# EAGLE board Inductance_meter (EAGLE 6.4)
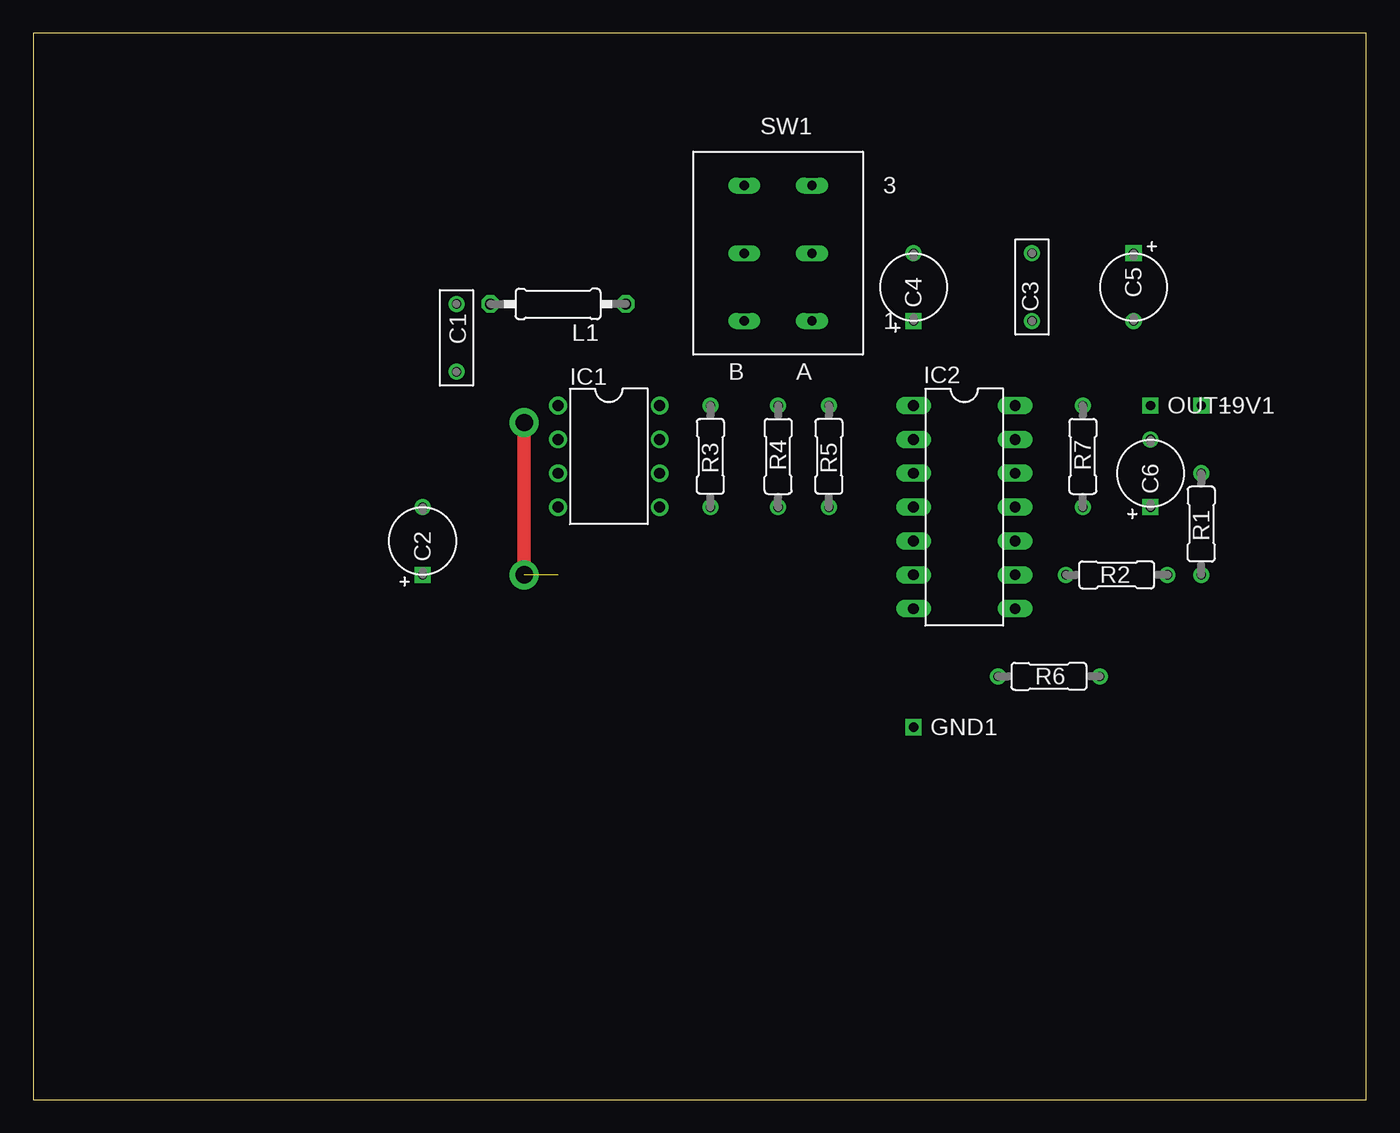
[diagram p0: board, top side]
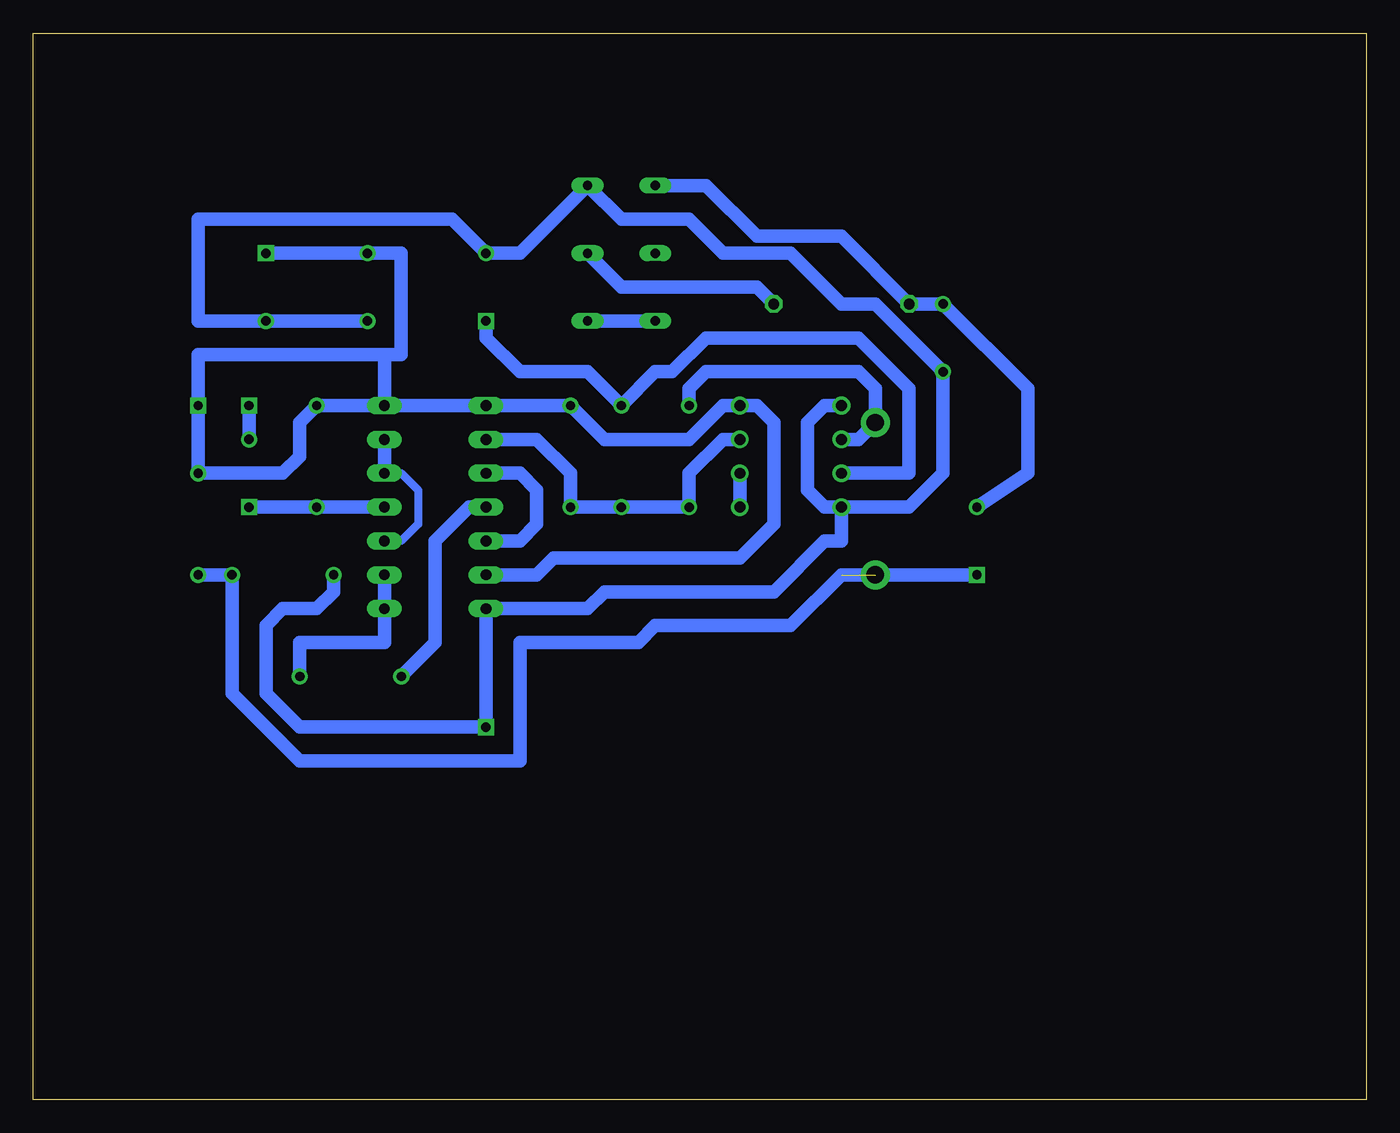
[diagram p1: board, bottom side, seen from below]

Size 100 x 80 mm. Coordinates in mm from the lower left corner, seen from the top.
Outline: 0,0 100,0 100,80 0,80 0,0
Copper layers (1*16): Top 0.035mm / dielectric 1.5mm / Bottom 0.035mm
Design rules "default *": minimum track width 10mil, minimum drill 24mil, track to track 8mil, track to pad 8mil, pad to pad 8mil, via to via 8mil, smd to smd 8mil, copper to edge 40mil, drill to drill 8mil, minimum pad ring 10mil, minimum via ring 8mil, stop-mask expansion 4mil, vias tented up to drill 0mil, thermal gap 10mil

## Footprints (pad centres in the part's own frame; a part is rotated, then mirrored left to right if it is on the bottom)
SQUARE = drill 0.7 square: 1 0,0
072X025 = drill 0.7: 1 -2.54,0; 2 2.54,0
050_020_2 = drill 0.7 square: + -2.54,0 | drill 0.7: - 2.54,0
DIL08 = drill 0.813 pad 1.27: 1 -3.81,-3.81; 2 -1.27,-3.81; 3 1.27,-3.81; 4 3.81,-3.81; 5 3.81,3.81; 6 1.27,3.81; 7 -1.27,3.81; 8 -3.81,3.81
DIL14 = drill 0.813 long: 1 -7.62,-3.81; 2 -5.08,-3.81; 3 -2.54,-3.81; 4 0,-3.81; 5 2.54,-3.81; 6 5.08,-3.81; 7 7.62,-3.81; 8 7.62,3.81; 9 5.08,3.81; 10 2.54,3.81; 11 0,3.81; 12 -2.54,3.81; 13 -5.08,3.81; 14 -7.62,3.81
0207/10 = drill 0.813 octagon: 1 -5.08,0; 2 5.08,0
R0207/3 = drill 0.7: 1 -3.81,0; 2 3.81,0
DPDT = drill 0.7 long: A1 -2.54,5.08; A2 -2.54,0; A3 -2.54,-5.08; B1 2.54,5.08; B2 2.54,0; B3 2.54,-5.08

## Placement (x,y rotation side)
+9V1  +9V(T)  [SQUARE]  87.63,52.07 0 top
C1  970pF  [072X025]  31.75,57.15 270 top
C2  10uF  [050_020_2]  29.21,41.91 90 top
C3  0,1uF  [072X025]  74.93,60.96 90 top
C4  10uF  [050_020_2]  66.04,60.96 90 top
C5  100uF  [050_020_2]  82.55,60.96 270 top
C6  100uF  [050_020_2]  83.82,46.99 90 top
GND1  GND(T)  [SQUARE]  66.04,27.94 0 top
IC1  LM311N  [DIL08]  43.18,48.26 270 top
IC2  4011N  [DIL14]  69.85,44.45 270 top
L1  68uH  [0207/10]  39.37,59.69 180 top
OUT1  OUT(T)  [SQUARE]  83.82,52.07 0 top
R1  100K  [R0207/3]  87.63,43.18 90 top
R2  100K  [R0207/3]  81.28,39.37 0 top
R3  100K  [R0207/3]  50.8,48.26 90 top
R4  47K  [R0207/3]  55.88,48.26 270 top
R5  1K  [R0207/3]  59.69,48.26 90 top
R6  150R  [R0207/3]  76.2,31.75 180 top
R7  1K  [R0207/3]  78.74,48.26 270 top
SW1  DPDT  [DPDT]  55.88,63.5 180 top

## Library data of the parts
+9V1 GND1 OUT1 = gm-supply
C1 C3 = gm-caps-film-box
C2 C4-C6 = gm-caps-electro-pol
IC1 = linear
IC2 = 40xx
L1 = eagle-ltspice; SPICEMODEL: NONE; SPICEPREFIX: L
R1-R7 = gm-resistors
SW1 = gm-switches

## Nets
+9V: +9V1.1 C3.2 C5.+ IC1.8 IC2.1 IC2.6 IC2.14 R1.2 R5.2 R7.1
GND: C1.2 C3.1 C4.- C5.- GND1.1 IC1.1 IC1.4 IC2.7 R2.1 SW1.A3
N$1: L1.1 SW1.A2
N$2: C1.1 C2.- L1.2 SW1.B3
N$3: SW1.A1 SW1.B1
N$5: IC1.7 IC2.2 R3.1 R4.2 R5.1
N$6: C2.+ IC1.2 R1.1 R2.2 R3.2
N$7: IC2.4 R6.2
N$8: IC1.5 IC1.6
N$9: C4.+ IC1.3 R4.1
N$11: IC2.3 IC2.5
N$12: IC2.8 IC2.9 R6.1
N$13: IC2.10 IC2.12 IC2.13
N$14: C6.+ IC2.11 R7.2
OUT: C6.- OUT1.1

## Tracks (layer width: path | path; a pad name or v marks a point on that pad's centre or on a via)
+9V
  Bottom 1.016: IC2.14 R7.1 80.01,50.8 80.01,48.26 81.28,46.99 R1.2 +9V1.1 87.63,55.88 73.66,55.88 | IC2.14 IC2.1 R5.2 57.15,49.53 50.8,49.53 48.26,52.07 IC1.8 45.72,52.07 44.45,50.8 44.45,43.18 46.99,40.64 60.96,40.64 62.23,39.37 IC2.6 | C5.+ C3.2 72.39,63.5 72.39,55.88 73.66,55.88 | IC2.14 73.66,55.88
GND
  Bottom 1.016: IC1.4 40.64,44.45 41.91,45.72 41.91,50.8 40.64,52.07 IC1.1 | IC1.4 39.37,41.91 40.64,41.91 44.45,38.1 57.15,38.1 58.42,36.83 IC2.7 GND1.1 80.01,27.94 82.55,30.48 82.55,35.56 81.28,36.83 78.74,36.83 77.47,38.1 R2.1 | IC1.4 34.29,44.45 31.75,46.99 C1.2 36.83,59.69 39.37,59.69 43.18,63.5 48.26,63.5 50.8,66.04 55.88,66.04 SW1.A3 63.5,63.5 C4.- 68.58,66.04 87.63,66.04 87.63,58.42 C5.- C3.1
N$1
  Bottom 1.016: L1.1 45.72,60.96 55.88,60.96 SW1.A2
N$2
  Bottom 1.016: C2.- 25.4,46.99 25.4,53.34 C1.1 L1.2 39.37,64.77 45.72,64.77 49.53,68.58 SW1.B3
N$3
  Bottom 1.016: SW1.A1 SW1.B1
N$4  (via drill 1.3 pad 2.18)
  other vias: 36.83,39.37
N$5
  Bottom 1.016: IC2.2 62.23,49.53 59.69,46.99 R5.1 R4.2 R3.1 50.8,46.99 48.26,49.53 IC1.7
N$6  (via drill 1.3 pad 2.18)  (1 unrouted)
  Top 1.016: v36.83,50.8 36.83,39.37
  Bottom 1.016: IC1.2 38.1,49.53 v36.83,50.8 36.83,53.34 38.1,54.61 49.53,54.61 50.8,53.34 R3.2 | R1.1 R2.2 85.09,30.48 80.01,25.4 63.5,25.4 63.5,34.29 54.61,34.29 53.34,35.56 43.18,35.56 39.37,39.37 C2.+
N$7
  Bottom 1.016: R6.2 69.85,34.29 69.85,41.91 67.31,44.45 IC2.4
N$8
  Bottom 1.016: IC1.6 IC1.5
N$9
  Bottom 1.016: C4.+ 66.04,57.15 63.5,54.61 58.42,54.61 R4.1 53.34,54.61 52.07,54.61 49.53,57.15 38.1,57.15 34.29,53.34 34.29,46.99 IC1.3
N$11
  Bottom 1.016: IC2.3 63.5,46.99 62.23,45.72 62.23,43.18 63.5,41.91 IC2.5
N$12
  Bottom 1.016: IC2.9 IC2.8 73.66,34.29 80.01,34.29 R6.1
N$13
  Bottom 0.61: IC2.12 72.39,46.99 71.12,45.72 71.12,43.18 72.39,41.91 IC2.10
  Bottom 1.016: IC2.13 IC2.12
N$14
  Bottom 1.016: IC2.11 R7.2 C6.+
OUT
  Bottom 1.016: OUT1.1 C6.-